# EAGLE board FPCboard (EAGLE 9.5.0)
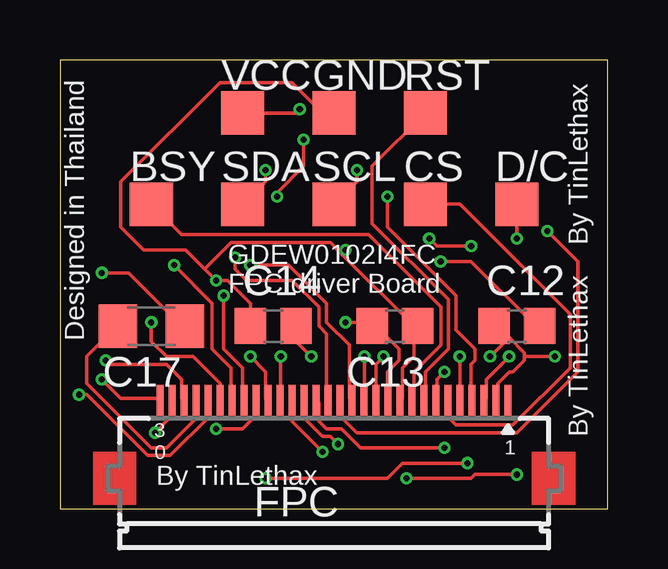
[diagram p0: board, top side]
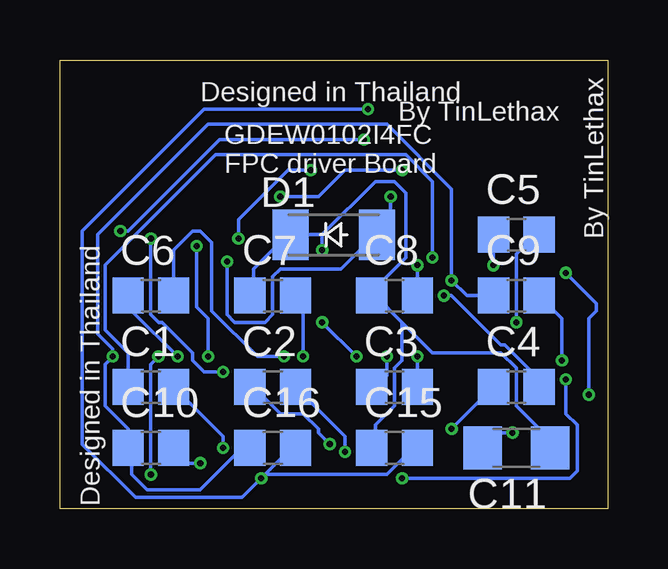
[diagram p1: board, bottom side, seen from below]

Size 22.84 x 18.72 mm. Coordinates in mm from the lower left corner, seen from the top.
Outline: 0,0 22.84,0 22.84,18.72 0,18.72 0,0
Copper layers (1*16): Top 0.035559375mm / dielectric 1.6mm / Bottom 0.035559375mm
Design rules "oshpark-2layer": minimum track width 6mil, minimum drill 10mil, track to track 6mil, track to pad 6mil, pad to pad 6mil, via to via 6mil, smd to smd 6mil, copper to edge 15mil, drill to drill 6mil, minimum pad ring 5mil, minimum via ring 5mil, stop-mask expansion 2.5mil, vias tented up to drill 0mil, thermal gap 10mil

## Footprints (pad centres in the part's own frame; a part is rotated, then mirrored left to right if it is on the bottom)
TP18SQ = smd 1.8 x 1.8: TP 0,0
C0805 = smd 1.3 x 1.5: 1 -0.95,0; 2 0.95,0
C1206 = smd 1.6 x 1.8: 1 -1.4,0; 2 1.4,0
SOD-123_MINI-SMA = smd 1.5 x 2.1: A 1.8,0; C -1.8,0
FH12-30S-0.5SH = smd 0.3 x 1.3: 1 7.25,3.25; 2 6.75,3.25; 3 6.25,3.25; 4 5.75,3.25; 5 5.25,3.25; 6 4.75,3.25; 7 4.25,3.25; 8 3.75,3.25; 9 3.25,3.25; 10 2.75,3.25; 11 2.25,3.25; 12 1.75,3.25; 13 1.25,3.25; 14 0.75,3.25; 15 0.25,3.25; 16 -0.25,3.25; 17 -0.75,3.25; 18 -1.25,3.25; 19 -1.75,3.25; 20 -2.25,3.25; 21 -2.75,3.25; 22 -3.25,3.25; 23 -3.75,3.25; 24 -4.25,3.25; 25 -4.75,3.25; 26 -5.25,3.25; 27 -5.75,3.25; 28 -6.25,3.25; 29 -6.75,3.25; 30 -7.25,3.25

## Placement (x,y rotation side)
BSY  TPSQTP18SQ  [TP18SQ]  3.81,12.7 0 top
C1  1uF  [C0805]  19.05,5.08 0 bottom
C2  1uF  [C0805]  13.97,5.08 0 bottom
C3  1uF  [C0805]  8.89,5.08 0 bottom
C4  1uF  [C0805]  3.81,5.08 0 bottom
C5  1uF  [C0805]  3.81,11.43 0 bottom
C6  1uF  [C0805]  19.05,8.89 0 bottom
C7  1uF  [C0805]  13.97,8.89 0 bottom
C8  1uF  [C0805]  8.89,8.89 0 bottom
C9  1uF  [C0805]  3.81,8.89 0 bottom
C10  1uF  [C0805]  19.05,2.54 0 bottom
C11  2.2uF  [C1206]  3.81,2.54 180 bottom
C12  1uF  [C0805]  19.05,7.62 0 top
C13  100nF  [C0805]  13.97,7.62 180 top
C14  1uF  [C0805]  8.89,7.62 0 top
C15  100nF  [C0805]  8.89,2.54 0 bottom
C16  4.7uF  [C0805]  13.97,2.54 0 bottom
C17  2.2uF  [C1206]  3.81,7.62 180 top
CS  TPSQTP18SQ  [TP18SQ]  15.24,12.7 0 top
D1  MBR0530  [SOD-123_MINI-SMA]  11.43,11.43 0 bottom
D/C  TPSQTP18SQ  [TP18SQ]  19.05,12.7 0 top
FPC  FH12-30S-0.5SH  [FH12-30S-0.5SH]  11.43,1.27 0 top
GND  TPSQTP18SQ  [TP18SQ]  11.43,16.51 0 top
RST  TPSQTP18SQ  [TP18SQ]  15.24,16.51 0 top
SCL  TPSQTP18SQ  [TP18SQ]  11.43,12.7 0 top
SDA  TPSQTP18SQ  [TP18SQ]  7.62,12.7 0 top
VCC  TPSQTP18SQ  [TP18SQ]  7.62,16.51 0 top

## Library data of the parts
BSY CS D/C GND RST SCL SDA VCC = testpad
C1-C17 = rcl; SPICEPREFIX: C
D1 = diode
FPC = con-hirose; MPN: FH12-30S-0.5SH(55); OC_FARNELL: 1324555; OC_NEWARK: 34M6176

## Nets
BUSY: BSY.TP FPC.9
CS: CS.TP FPC.6
D/C: D/C.TP FPC.7
GND: C6.1 C7.1 C8.1 C9.1 C10.1 C11.1 C12.1 C13.1 C14.1 C15.1 C16.1 D1.C FPC.2 FPC.10 GND.TP
N$1: C1.1 FPC.16
N$2: C1.2 FPC.17
N$3: C2.1 FPC.18
N$4: C2.2 FPC.19
N$5: C3.1 FPC.20
N$6: C3.2 FPC.21
N$7: C4.1 FPC.22
N$8: C4.2 FPC.23
N$9: C5.1 FPC.24
N$10: C5.2 FPC.25
N$11: C6.2 FPC.12
N$12: C7.2 FPC.13
N$13: C8.2 FPC.14
N$14: C12.2 D1.A FPC.15
N$15: C11.2 FPC.29
N$16: C9.2 FPC.28
N$17: C10.2 FPC.30
N$18: C13.2 C14.2 FPC.11
N$19: C17.1 FPC.26
N$20: C17.2 FPC.27
RESET: FPC.8 RST.TP
SCL(SCK): FPC.5 SCL.TP
SDA(MOSI): FPC.4 SDA.TP
VCC: C15.2 C16.2 FPC.3 VCC.TP

## Tracks (layer width: path | path; a pad name or v marks a point on that pad's centre or on a via)
BUSY
  Top 0.152: BSY.TP 5.08,11.43 12.86,11.43 15.88,8.41 15.88,6.83 14.76,5.71 14.76,4.6 FPC.9
CS
  Top 0.152: CS.TP 16.67,12.7 21.27,8.1 21.27,5.87 18.89,3.49 16.51,3.49 16.19,3.81 16.19,4.45 FPC.6
D/C  (via drill 0.25)
  Top 0.152: v16.03,5.71 15.72,5.4 15.72,4.6 FPC.7 | D/C.TP v19.05,11.27
  Bottom 0.152: v16.03,5.71 16.83,5.71 17.3,6.19 17.3,6.51 18.57,7.78 18.73,7.78 19.05,8.1 v19.05,11.27
GND  (via drill 0.25)
  Top 0.152: 19.37,6.35 19.37,6.51 18.73,7.14 | 19.37,6.35 19.37,6.19 18.89,5.71 18.73,5.71 18.26,5.24 18.26,4.6 FPC.2 | 18.73,7.14 18.26,7.62 C12.1 18.73,7.14 | 18.73,7.14 v17.94,6.35 | 19.37,6.35 v20.64,6.35 | 14.76,7.62 14.76,6.35 14.29,5.87 14.29,4.6 FPC.10 | C14.1 7.94,8.57 6.99,9.53 v6.51,9.53 6.03,10 | GND.TP 10.95,16.51 9.68,17.78 6.67,17.78 2.54,13.65 2.54,11.75 3.49,10.79 5.24,10.79 6.03,10 | 11.75,10.64 11.27,11.11 7.14,11.11 6.03,10 | 11.75,10.64 14.76,7.62 | 14.76,7.62 C13.1 | 11.75,10.64 v11.91,10.79
  Bottom 0.152: C7.1 14.76,8.89 14.76,10 13.34,11.43 D1.C 11.91,11.43 | 8.57,7.78 8.57,6.19 8.89,5.87 8.89,4.29 9.68,3.49 9.68,2.54 C15.1 | 9.68,8.89 8.57,7.78 | 8.57,7.78 7.3,6.51 4.45,6.51 3.81,5.87 3.81,4.29 2.54,3.02 2.54,2.54 C11.1 | 11.91,11.43 9.68,13.65 8.89,13.65 8.41,13.18 8.41,10.48 9.68,9.21 9.68,8.89 | 9.68,8.89 C8.1 | C16.1 15.24,2.54 16.99,0.79 19.21,0.79 19.84,1.43 19.84,2.54 C10.1 20,3.33 20.95,4.29 20.95,6.03 v20.64,6.35 20.64,6.67 21.27,7.3 21.27,11.43 16.67,16.03 9.21,16.03 6.51,13.34 v6.51,9.53 5.87,8.89 C9.1 | v17.94,6.35 19.84,8.26 19.84,8.89 C6.1 | v11.91,10.79 11.91,11.43
N$1  (via drill 0.25)
  Top 0.152: v7.3,10.48 7.3,10 7.78,9.53 9.68,9.53 10.79,8.41 10.79,7.62 11.11,7.3 11.11,4.6 FPC.16
  Bottom 0.152: v7.3,10.48 7.3,13.65 8.41,14.76 16.35,14.76 20.95,10.16 20.95,7.46 20,6.51 C1.1
N$2  (via drill 0.25)
  Top 0.152: v16.03,2.54 12.54,2.54 11.75,3.33 11.11,3.33 10.79,3.65 10.79,4.45 FPC.17
  Bottom 0.152: v16.03,2.54 16.03,3.02 C1.2
N$3  (via drill 0.25)
  Top 0.152: v11.59,2.7 11.27,3.02 10.95,3.02 10.16,3.81 10.16,4.45 FPC.18
  Bottom 0.152: v11.59,2.7 12.06,3.17 12.06,3.33 12.7,3.97 13.65,3.97 14.76,5.08 C2.1
N$4  (via drill 0.25)
  Top 0.152: v10.95,2.38 9.68,3.65 9.68,4.45 FPC.19
  Bottom 0.152: v10.95,2.38 10.95,3.02 C2.2
N$5  (via drill 0.25)
  Top 0.152: v9.21,6.35 9.21,4.6 FPC.20
  Bottom 0.152: v9.21,6.35 9.21,5.56 9.68,5.08 C3.1
N$6  (via drill 0.25)
  Top 0.152: v7.94,6.35 8.57,5.71 8.57,4.6 FPC.21
  Bottom 0.152: v7.94,6.35 C3.2
N$7  (via drill 0.25)
  Top 0.152: v6.51,3.33 7.62,3.33 8.1,3.81 8.1,4.45 FPC.22
  Bottom 0.152: v6.51,3.33 C4.1
N$8  (via drill 0.25)
  Top 0.152: v6.83,8.89 6.83,6.67 7.62,5.87 7.62,4.6 FPC.23
  Bottom 0.152: v6.83,8.89 6.51,8.89 4.45,6.83 4.29,6.83 3.02,5.56 3.02,5.08 C4.2
N$9  (via drill 0.25)
  Top 0.152: v4.76,10.16 6.35,8.57 6.35,6.67 7.14,5.87 7.14,4.6 FPC.24
  Bottom 0.152: v4.76,10.16 C5.1
N$10  (via drill 0.25)
  Top 0.152: v3.81,7.78 3.81,6.99 4.45,6.35 5.56,6.35 6.67,5.24 6.67,4.6 FPC.25
  Bottom 0.152: v3.81,7.78 3.81,10.64 3.02,11.43 C5.2
N$11  (via drill 0.25)
  Top 0.152: v13.49,6.35 13.18,6.03 13.18,4.6 FPC.12
  Bottom 0.152: v13.49,6.35 14.61,6.35 16.51,8.26 16.51,11.11 16.99,11.59 17.3,11.59 18.1,10.79 C6.2
N$12  (via drill 0.25)
  Top 0.152: v12.7,6.35 12.7,4.6 FPC.13
  Bottom 0.152: v12.7,6.35 12.7,8.57 C7.2
N$13  (via drill 0.25)
  Top 0.152: v7.94,10.16 9.53,10.16 11.11,8.57 11.11,7.78 12.06,6.83 12.06,4.6 FPC.14
  Bottom 0.152: v7.94,10.16 C8.2
N$14  (via drill 0.25)
  Top 0.152: v20.32,11.59 21.59,10.32 21.59,5.71 19.05,3.17 12.38,3.17 11.75,3.81 11.75,4.45 FPC.15 | v10.16,15.4 10.16,14.29 9.05,13.18 v9.05,13.02 | v15.88,10.32 17.14,10.32 19.84,7.62 C12.2
  Bottom 0.152: v20.32,11.59 20,11.59 16.19,15.4 v10.16,15.4 | v9.05,13.02 9.05,11.91 9.53,11.43 D1.A 9.68,11.43 11.11,10 13.65,10 13.97,9.68 13.97,8.1 14.29,7.78 15.56,7.78 15.88,8.1 v15.88,10.32
N$15  (via drill 0.25)
  Top 0.152: v3.97,3.17 4.6,3.81 4.6,4.45 FPC.29
  Bottom 0.152: v3.97,3.17 4.45,3.17 5.08,2.54 C11.2
N$16  (via drill 0.25)
  Top 0.152: v1.91,6.19 2.06,6.03 4.45,6.03 5.08,5.4 5.08,4.6 FPC.28
  Bottom 0.152: v1.91,6.19 1.91,7.94 C9.2
N$17  (via drill 0.25)
  Top 0.152: v1.75,5.4 2.54,4.6 4.13,4.6 FPC.30 | v8.57,1.27 13.65,1.27 14.29,1.91 v16.99,1.91
  Bottom 0.152: v1.75,5.4 1.75,3.97 1.27,3.49 1.27,1.59 1.59,1.27 v8.57,1.27 | v16.99,1.91 17.46,1.91 C10.2
N$18  (via drill 0.25)
  Top 0.152: FPC.11 13.65,4.6 13.65,5.71 14.13,6.19 14.13,6.67 13.18,7.62 C13.2 12.86,7.78 v11.91,7.78 | v10.48,6.35 9.84,6.99 C14.2
  Bottom 0.152: v11.91,7.78 v10.48,6.35
N$19  (via drill 0.25)
  Top 0.152: v0.79,4.76 1.11,4.76 3.65,2.22 4.6,2.22 6.19,3.81 6.19,4.45 FPC.26 | v1.75,9.84 2.86,9.84 5.08,7.62 C17.1
  Bottom 0.152: v0.79,4.76 0.79,7.94 0.48,8.26 0.48,8.57 v1.75,9.84
N$20
  Top 0.152: FPC.27 5.71,4.45 5.71,3.81 4.45,2.54 3.81,2.54 1.11,5.24 1.11,6.35 2.38,7.62 C17.2
RESET
  Top 0.152: RST.TP 13.02,14.29 13.02,11.91 16.19,8.73 16.19,6.67 15.24,5.71 15.24,4.6 FPC.8
SCL(SCK)  (via drill 0.25)
  Top 0.152: v16.67,6.35 16.67,4.6 FPC.5 | v17.14,10.95 15.72,10.95 v15.4,11.27 | v12.38,14.13 12.38,13.65 SCL.TP
  Bottom 0.152: v16.67,6.35 16.67,7.94 17.14,8.41 v17.14,10.95 | v15.4,11.27 15.4,12.06 13.34,14.13 v12.38,14.13
SDA(MOSI)  (via drill 0.25)
  Top 0.152: v13.65,13.02 13.65,11.75 16.51,8.89 16.51,7.46 17.3,6.67 17.3,6.19 17.14,6.03 17.14,4.6 FPC.4 | v8.57,14.13 8.57,13.65 SDA.TP
  Bottom 0.152: v13.65,13.02 12.06,13.02 10.95,14.13 v8.57,14.13
VCC  (via drill 0.25)
  Top 0.152: v18.73,6.35 17.78,5.4 17.78,4.6 FPC.3 | v19.05,1.43 17.3,1.43 17.14,1.27 v14.45,1.27 | VCC.TP 9.84,16.51 v10,16.67
  Bottom 0.152: v18.73,6.35 19.05,6.03 v19.05,1.43 | 14.29,1.43 13.18,2.54 C16.2 | 14.29,1.43 9.21,1.43 8.1,2.54 C15.2 | 14.29,1.43 v14.45,1.27 15.24,0.48 19.68,0.48 21.91,2.7 21.91,11.59 16.83,16.67 v10,16.67

## Text on the board
tNames: By TinLethax | GDEW0102I4FC / FPC driver Board | Designed in Thailand | By TinLethax | By TinLethax
bNames: By TinLethax | By TinLethax | Designed in Thailand | GDEW0102I4FC / FPC driver Board | Designed in Thailand